# Altium PCB FoodFocus_PCBDoc.PcbDoc
Units mm, origin at the board's own origin, x right, y up, seen from the top; angles counter-clockwise.
Board outline 100 x 60 mm, 2 copper layers (Top Layer, Bottom Layer); 25 components, 24 nets, 93 pads, 0 vias.
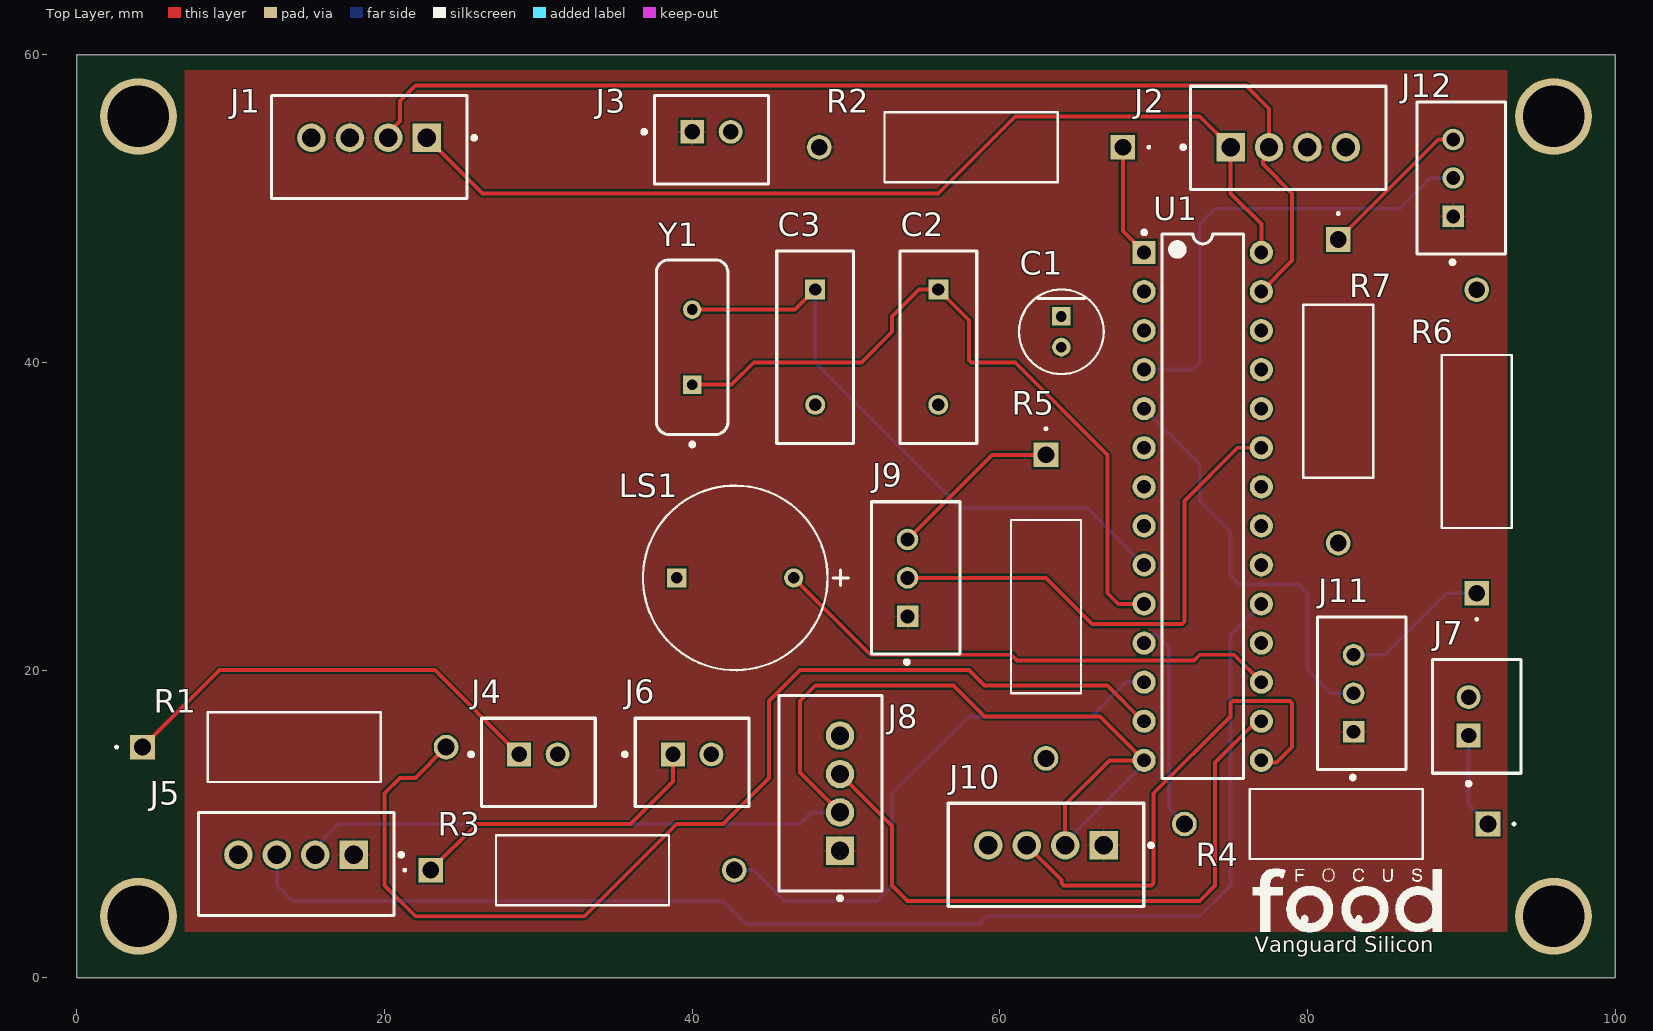
[diagram p0: Top Layer view]
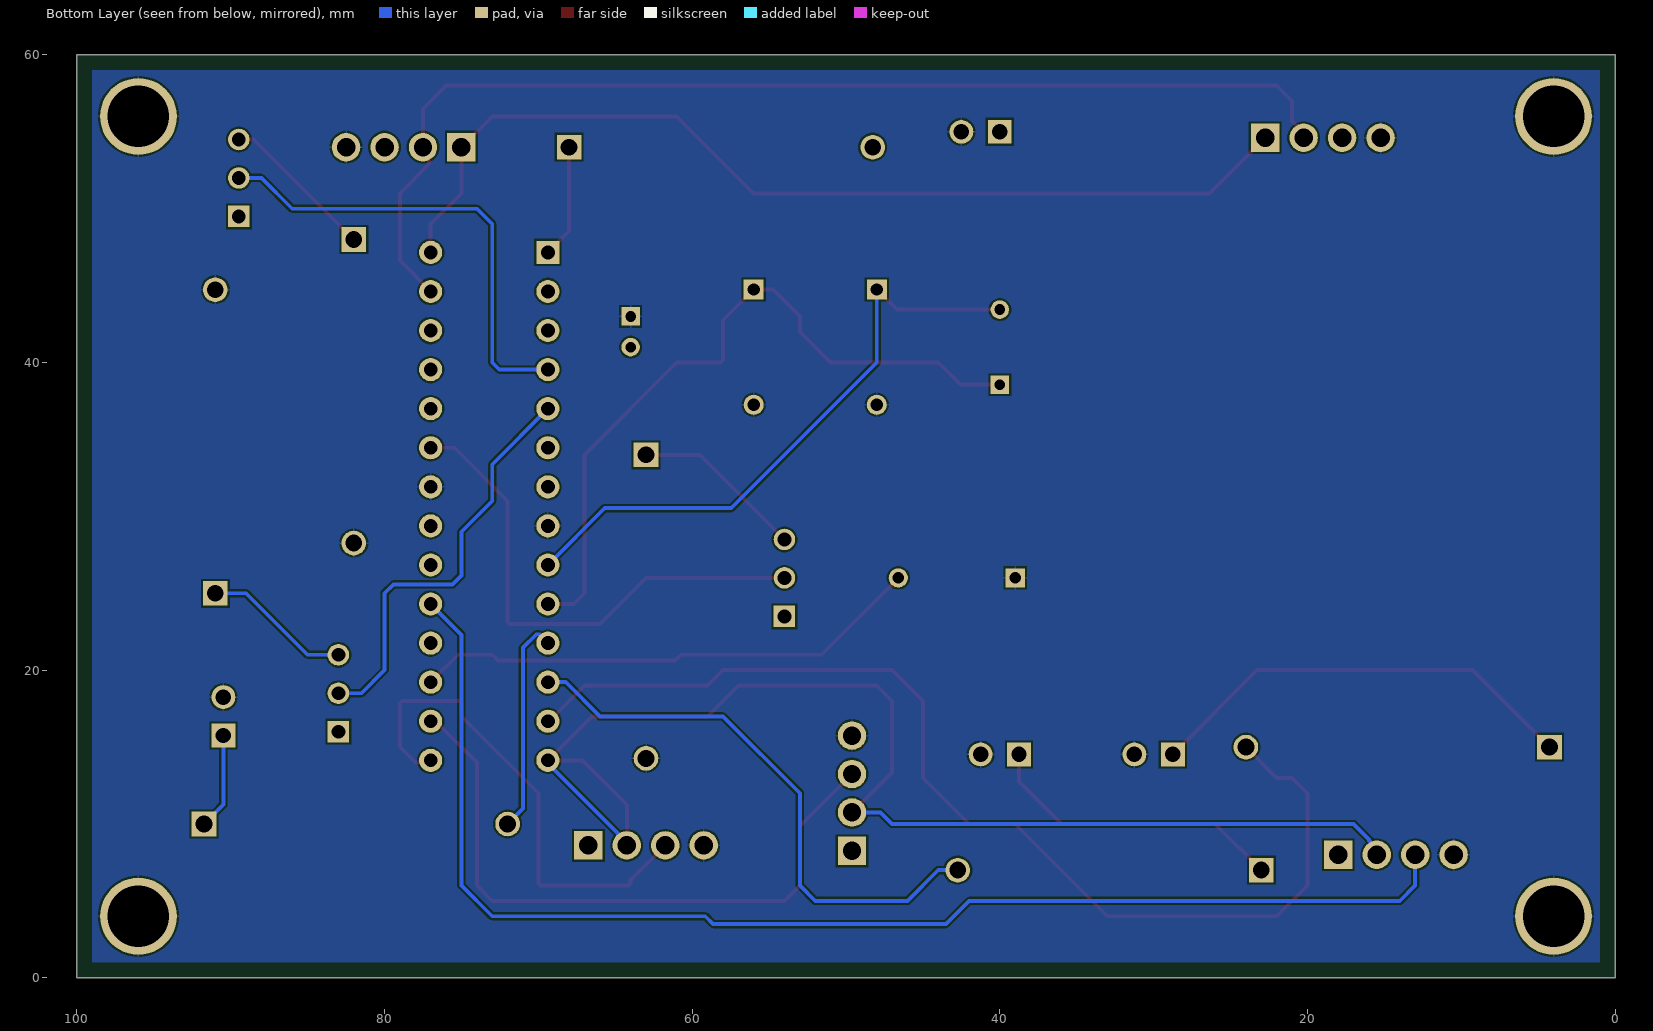
[diagram p1: Bottom Layer view, seen from below]
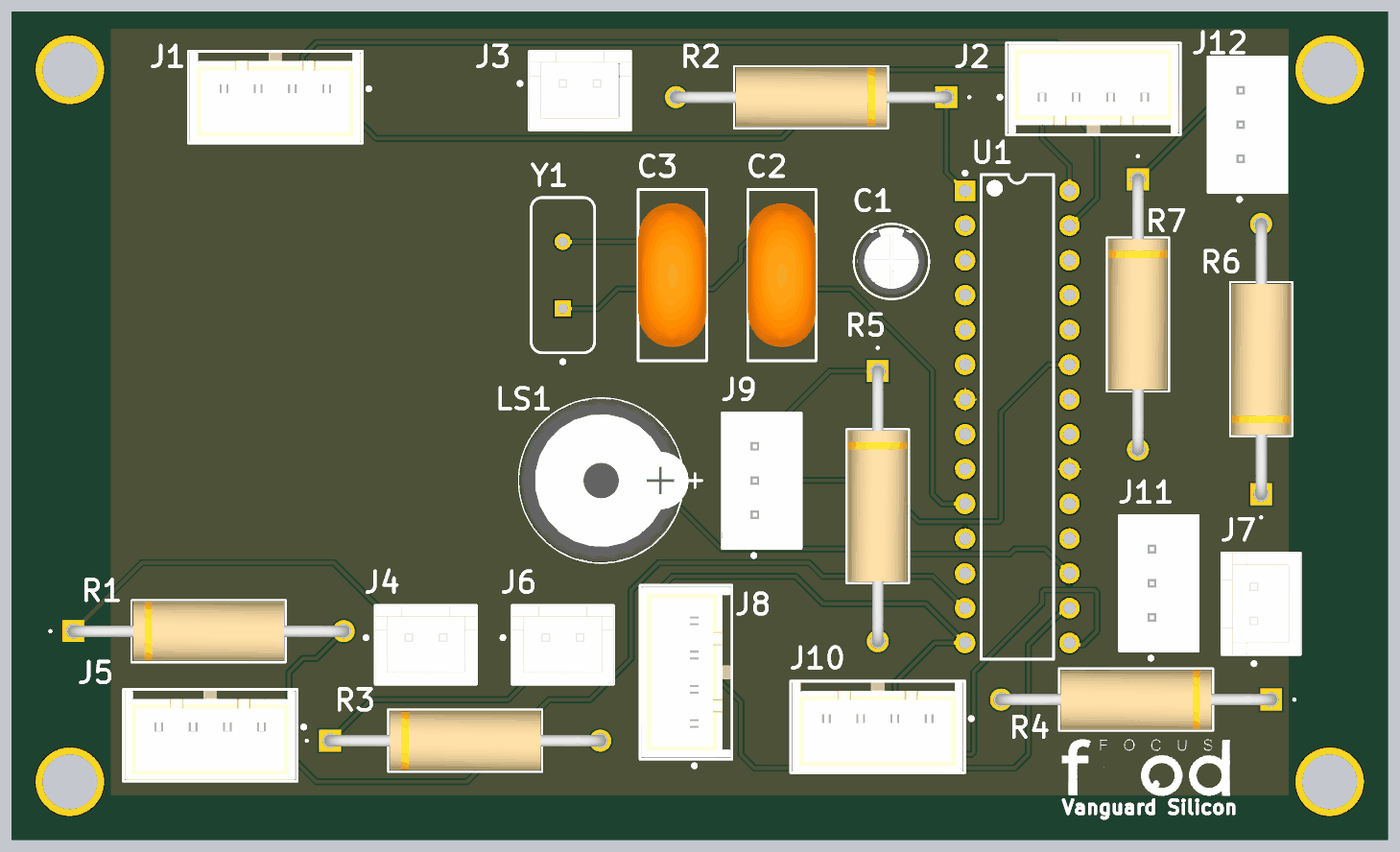
[diagram p2: 3D render of the assembled board from above, using the file's embedded part models]

## Layer stack, top to bottom
Top Solder: solder mask 0.0102, Solder Resist, Dk 3.5
Top Layer: signal copper 0.0356
Dielectric 1: dielectric 0.32, FR-4, Dk 4.8
Bottom Layer: signal copper 0.0356
Bottom Solder: solder mask 0.0102, Solder Resist, Dk 3.5

## Board outline
0,60 100,60 100,0 0,0

## Design rules (kind name [scope] priority, off if disabled: settings)
BoardOutlineClearance [All] p1: gap=0.2 ignorepadtopadclearanceinfootprint=FALSE
Clearance [All] p1: gap=0.127 ignorepadtopadclearanceinfootprint=FALSE except(0.25: Arc-Hole Track-Hole SMDPad-Hole THPad-Hole Via-Hole Fill-Hole Poly-Hole Region-Hole Text-Hole)
ComponentClearance [All] p1: gap=0.127 collisioncheckmode=3 verticalgap=0.127 showdistances=TRUE
DiffPairsRouting [All] p1: maxlimit=0.254 minlimit=0.127 mostfreqgap=0.127 toplayer_minwidth=0.127 toplayer_maxwidth=25.4 toplayer_prefwidth=0.127 bottomlayer_minwidth=0.127 bottomlayer_maxwidth=25.4 bottomlayer_prefwidth=0.127 maxuncoupledlength=12.7
Height [All] p1: minheight=0 maxheight=1816.048 prefheight=12.7
HoleSize [All] p1: absolutevalues=TRUE maxlimit=6.3 minlimit=0.3 maxpercent=80.000 minpercent=20.000
HoleToHoleClearance [All] p1: gap=0.25 allowstackedmicrovias=FALSE
MinimumAnnularRing [All] p1: minimumring=0.076
MinimumSolderMaskSliver [All] p1: minsoldermaskwidth=0
PlaneClearance [All] p1: clearance=0.127
PlaneConnect PlaneConnectPowerPads [InPadClass('PowerPads')] p1: planeconnectstyle=Direct reliefexpansion=0.508 reliefentries=4 reliefconductorwidth=0.254 reliefairgap=0.254
PlaneConnect [All] p2: pad.planeconnectstyle=Relief pad.reliefexpansion=0.3 pad.reliefentries=4 pad.reliefconductorwidth=0.127 pad.reliefairgap=0.127 via.planeconnectstyle=Direct via.reliefexpansion=0.3 via.reliefentries=4 via.reliefconductorwidth=0.127 via.reliefairgap=0.127
PolygonConnect PolygonConnectPowerPads [All vs (InPadClass('PowerPads'))] p1: connectstyle=Direct reliefconductorwidth=0.254 reliefentries=4 polygonreliefangle="90 Angle" airgapwidth=0.254
PolygonConnect [All] p2: thpad.connectstyle=Relief thpad.reliefconductorwidth=0.127 thpad.reliefentries=4 thpad.polygonreliefangle="90 Angle" thpad.airgapwidth=0.127 smdpad.connectstyle=Relief smdpad.reliefconductorwidth=0.127 smdpad.reliefentries=4 smdpad.polygonreliefangle="90 Angle" smdpad.airgapwidth=0.127 via.connectstyle=Direct via.reliefconductorwidth=0.127 via.reliefentries=4 via.polygonreliefangle="90 Angle" via.airgapwidth=0.127
RoutingVias [All] p1: holewidth=0.3 width=0.6 viastyle="Through Hole" minholewidth=0.3 minwidth=0.6 maxholewidth=0.6 maxwidth=6.6
SilkToSilkClearance [All] p1: silktosilkclearance=0
SilkToSolderMaskClearance [IsPad] p1: minsilkscreentomaskgap=0.127 clearancetoexposedcopper=TRUE
SolderMaskExpansion [All] p1: expansion=0.075 istentingtop=FALSE
Width [All] p1: maxlimit=25.4 minlimit=0.127 preferedwidth=0.127 minimp=50.000000 maximp=50.000000 favimp=50.000000
20 further rules are at their usual default settings.

## Components (designator, comment, footprint, x,y, rotation, side; value= is the part's Value field where it differs from the comment)
C1 "10uF" FP-RAD-TH-D_5_0_5-L_11_1-MFG 64,42 r270 top
C2 "22pF" FP-VY2472M49Y5UG63V7-MFG 56,41 r270 top
C3 "22pF" FP-VY2472M49Y5UG63V7-MFG 48,41 r270 top
J1 "J_RTC" FP-35312-0460-MFG 19,54 r180 top
J2 "J_I2C" FP-35312-0460-MFG 78.75,54.61 r0 top
J3 "J_POWER" FP-B2B-XH-A_LF_SN-MFG 41.25,54.475 r0 top
J4 "J_SALT_LED" FP-B2B-XH-A_LF_SN-MFG 30,14 r0 top
J5 "J_SALT_LC" FP-35312-0460-MFG 14.25,7.39 r180 top
J6 "J_SUGAR_LED" FP-B2B-XH-A_LF_SN-MFG 40,14 r0 top
J7 "J_OIL_LED" FP-B2B-XH-A_LF_SN-MFG 91,17 r90 top
J8 "J_SUGAR_LC" FP-35312-0460-MFG 49,12 r90 top
J9 "J_POT" FP-B3B-XH-A_LF_SN-MFG 54.525,26 r90 top
J10 "J_OIL_LC" FP-35312-0460-MFG 63,8 r180 top
J11 "J_CFM_PUSH" FP-B3B-XH-A_LF_SN-MFG 83.525,18.5 r90 top
J12 "J_RPT_PUSH" FP-B3B-XH-A_LF_SN-MFG 90,52 r90 top
LS1 "BUZZER" FP-MCKPX-G1203A-K4056-MFG 42.8,26 r0 top
R1 "R_SALT_LED" RES_AC01_VIS 4.264,15 r0 top
R2 "R_ATMEGA" RES_AC01_VIS 68,54 r180 top
R3 "R_SUGAR_LED" RES_AC01_VIS 23,7 r0 top
R4 "R_OIL_LED" RES_AC01_VIS 91.736,10 r180 top
R5 "R_POT" RES_AC01_VIS 63,34 r270 top
R6 "R_CFM_PUSH" RES_AC01_VIS 91,25 r90 top
R7 "R_RPT_PUSH" RES_AC01_VIS 82,48 r270 top
U1 "ATmega328-PU" 28P3 73.19,30.65 r0 top
Y1 "16MHz" FOX-FOXSLF160-20 40,41 r90 top

## Footprints (in the part's own frame and the unit in brackets; to place one, negate y for a bottom-side part, rotate by r counter-clockwise, add the part's x,y. Pads: shape width x height; smd on the part's side, far side on the other; paste and mask are expansions set on the pad)
28P3 [mm] "28-Pin Plastic Dual In-Line Package (PDIP)"
  rect 1.5x1.5 hole 0.9: 1(-3.81,16.51)
  round 1.5 hole 0.9: 2(-3.81,13.97) 3(-3.81,11.43) 4(-3.81,8.89) 5(-3.81,6.35) 6(-3.81,3.81) 7(-3.81,1.27) 8(-3.81,-1.27) 9(-3.81,-3.81) 10(-3.81,-6.35) 11(-3.81,-8.89) 12(-3.81,-11.43) 13(-3.81,-13.97) 14(-3.81,-16.51) 15(3.81,-16.51) 16(3.81,-13.97) 17(3.81,-11.43) 18(3.81,-8.89) 19(3.81,-6.35) 20(3.81,-3.81) 21(3.81,-1.27) 22(3.81,1.27) 23(3.81,3.81) 24(3.81,6.35) 25(3.81,8.89) 26(3.81,11.43) 27(3.81,13.97) 28(3.81,16.51)
  silkscreen extent -3.93,-17.7 2.65,17.93, body extent -3.6,-17.65 3.6,17.65, height 4.58
FOX-FOXSLF160-20 [mm] "THD, 2-Leads, Body 11.35x4.65mm"
  rect 1.2x1.2 hole 0.7: 1(-2.44,0)
  round 1.2 hole 0.7: 2(2.44,0)
  silkscreen extent -6.45,-2.32 5.68,2.32, body extent -5.67,-2.32 5.68,2.33, height 3.6
FP-35312-0460-MFG [mm]
  rect 1.85x1.85 hole 1.2 paste-1000 mask+0: 1(-3.75,-0.61)
  round 1.85 hole 1.2 paste-1000 mask+0: 2(-1.25,-0.61) 3(1.25,-0.61) 4(3.75,-0.61)
  silkscreen extent -6.96,-3.35 6.36,3.35, body extent -6.46,-3.45 6.46,3.45, height 0.25
FP-B2B-XH-A_LF_SN-MFG [mm]
  rect 1.55x1.55 hole 1 paste-1000 mask+0: 1(-1.25,0.525)
  round 1.55 hole 1 paste-1000 mask+0: 2(1.25,0.525)
  silkscreen extent -4.5,-2.88 3.7,2.88, body extent -3.8,-2.98 3.8,2.98, height 0.25
FP-B3B-XH-A_LF_SN-MFG [mm]
  rect 1.4x1.4 hole 0.9 paste-1000 mask+0: 1(-2.5,0.525)
  round 1.4 hole 0.9 paste-1000 mask+0: 2(0,0.525) 3(2.5,0.525)
  silkscreen extent -5.6,-2.88 4.95,2.88, body extent -5.05,-2.98 5.05,2.98, height 0.25
FP-MCKPX-G1203A-K4056-MFG [mm]
  rect 1.25x1.25 hole 0.75 paste-1000 mask+0: 1(-3.8,0)
  round 1.25 hole 0.75 paste-1000 mask+0: 2(3.8,0)
  silkscreen extent -6,-6 7.35,6, body extent -6.1,-6.1 6.1,6.1, height 0.25
FP-RAD-TH-D_5_0_5-L_11_1-MFG [mm]
  rect 1.2x1.2 hole 0.7 paste-1000 mask+0: 1(-1,0)
  round 1.2 hole 0.7 paste-1000 mask+0: 2(1,0)
  silkscreen extent -2.75,-2.75 2.75,2.75, body extent -2.85,-2.85 2.85,2.85, height 0.25
FP-VY2472M49Y5UG63V7-MFG [mm]
  rect 1.3x1.3 hole 0.8 paste-1000 mask+0: 1(-3.75,0)
  round 1.3 hole 0.8 paste-1000 mask+0: 2(3.75,0)
  silkscreen extent -6.25,-2.5 6.25,2.5, body extent -6.35,-2.6 6.35,2.6, height 0.25
RES_AC01_VIS [mil]
  rect 63x63 / inner round 60 / far side rect 63x63 hole 43 paste-31.5 mask+0: 1(0,0)
  round 63 / inner round 60 / far side round 63 hole 43 paste-31.5 mask+0: 2(777,0)
  silkscreen extent -69,-90 610,90, body extent -16,-84 794,84, height 169

## Part data
C1: library part CMP-05427-000869-1, "Aluminum Electrolytic Capacitors (Radial Lead Type) 10uF ±20% 100V", Case/Package=Radial, Dielectric Material=Aluminium, Leakage Current=3uA, Max Operating Temperature=85°C, Min Operating Temperature=-40°C, Package Quantity=200, Ripple Current=70mA, Tolerance=20%, Voltage=100V, Capacitance=10uF, Construction=RADIAL, Contact Plating=Tin, Diameter=5mm, Dissipation Factor=0.1%, Height=11mm, Height - Seated (Max)=0.472inch, Lead Diameter=0.5mm, Lead Free="Lead Free", Lead Pitch=2mm, Lead/Base Style=Straight, Length=11mm, Life (Hours)=2000Hour, Mount="Through Hole", Number of Pins=2, Packaging=Bulk, Polarity=Polar, Radiation Hardening=No, REACH SVHC="No SVHC", Ripple Current (AC)=70mA, RoHS Compliant=Yes, Series=M, Termination=Radial, Voltage Rating=100V, Voltage Rating (DC)=100V, Width=5mm
C2 C3: library part CMP-02417-000047-1, "Capacitor Ceramic 4700pF ±20% Y5U BULK RADIAL", Capacitance=4.7nF, Case/Package=Radial, Dielectric=Y5U, Max Operating Temperature=125°C, Min Operating Temperature=-40°C, Package Quantity=1000, Resistor Type=Ceramic, Tolerance=20%, Voltage Rating=300V, Body Diameter=12.5mm, Diameter=12.5mm, Dissipation Factor=2.5%, Height - Seated (Max)=0.65inch, Lead Diameter=0.6mm, Lead Pitch=7.5mm, Lead/Base Style=Kinked, Mount="Through Hole", Packaging=Bulk, REACH SVHC="No SVHC", RoHS Compliant=Yes, Series=VY2, Termination=Radial, Thickness=5mm, Voltage Rating (AC)=300V, Voltage Rating (DC)=300V, Weight=0.040932oz
J1 J2 J5 J8 J10: library part CMP-04776-000928-1, "CONN HEADER 4POS 2.5MM VERT", Contact Resistance=20mR, Current Rating=3A, Max Operating Temperature=105°C, Min Operating Temperature=-40°C, Package Quantity=1000, Voltage Rating=250V, Contact Gender=Male, Contact Material=Brass, Contact Plating=Tin, Contact Post Length=3.4mm, Gender=Male, Glow Wire Compliant=Non-compliant, Housing Material=Nylon, Mount="Through Hole", Number of Circuits=4, Number Of Contacts=4, Number of Positions=4, Number Of Rows=1, Orientation=Vertical, Packaging=Bulk, Pitch=2.5mm, RoHS Compliant=Yes, Series=35312, Termination=Solder
J3 J4 J6 J7: library part CMP-2000-05888-3, "CONN HEADER VERT 2POS 2.5MM", Color=Natural, Contact Resistance=20mR, Current Rating=3A, Housing Color=White, Insulation Resistance=1GR, Max Operating Temperature=85°C, Max Voltage Rating (AC)=250V, Min Operating Temperature=-25°C, Connector Type="Male Pin", Contact Material=Brass, Contact Plating=Tin, Contact Type="Male Pin", Depth=5.75mm, Fastening Type=Detent, Housing Material=Polyamide, Lead Free="Lead Free", Lead Pitch=2.5mm, Length=7.4mm, Max Current Rating=3A, Max Voltage Rating (DC)=250V, Mount="Through Hole", Number Of Contacts=2, Number of Positions=2, Number Of Rows=1, Orientation=Straight, Packaging=Bulk, Pitch=2.5mm, REACH SVHC="No SVHC", Series=XH, Termination=Solder, Voltage Rating=250V, Voltage Rating (AC)=250V, Wire/Cable Gauge=22AWG
J9 J11 J12: library part CMP-17439-000014-3, "CONN HEADER VERT 3POS 2.5MM", Color=Natural, Contact Resistance=20mR, Current Rating=3A, Flammability Rating="UL94 V-0", Housing Color=White, Insulation Resistance=1GR, Max Operating Temperature=85°C, Max Voltage Rating (AC)=250V, Min Operating Temperature=-25°C, Connector Type=Header, Contact Finish - Mating=TIN, Contact Material=Brass, Contact Plating=Tin, Contact Shape=Square, Contact Type="Male Pin", Depth=5.75mm, Fastening Type=Detent, Gender=Male, Housing Material=Polyamide, Insulation Color=Natural, Insulation Material=Nylon, Lead Free="Lead Free", Lead Pitch=2.5mm, Length=9.9mm, Max Current Rating=3A, Max Voltage Rating (DC)=250V, Mount="Through Hole", Number Of Contacts=3, Number of Positions=3, Number Of Rows=1, Orientation=Straight, Packaging=Bulk, Pitch=2.5mm, REACH SVHC="No SVHC", Series=XH, Termination=Solder, Voltage Rating=250V, Voltage Rating (AC)=250V, Wire/Cable Gauge=22AWG
LS1: library part CMP-12433-000001-1, "MAGNETIC BUZZER AND TRANSDUCER - More Details", Current=30mA, Frequency=2300Hz, Manufacturer="Multicomp Pro", Manufacturer Part Number=MCKPX-G1203A-K4056, Max Supply Voltage=5V, Min Supply Voltage=2V, Operating Supply Voltage=3V, Package=0, Temperature="-20°C to +70°C", Temperature Range High=+70°C, Temperature Range Low=-20°C, Automotive=No, Category=Speak, ComponentLink2Description=Datasheet, ComponentLink2URL=http://www.farnell.com/datasheets/1498149.pdf?_ga=2.17855225.1157923166.1572356775-536200964.1569240579, Device Class L1=Electromechanical, Device Class L2="Audio Products", Device Class L3=Buzzers, Height=9.5mm, Lead Free=Yes, Octopart=https://octopart.com/mckpx-g1203a-k4056-multicomp-12157154, RoHS=TRUE, Standoff Height=0.5mm
R1 R2 R3 R4 R5 R6 R7: library part CMP-00030-42338632-1, "AC01000002200JA100 Resistor, 220 Ohm, ± 5%, 1 W, Axial Leaded, Wirewound, General Purpose", Case/Package=Conformal, Max Operating Temperature=275°C, Max Power Dissipation=1W, Min Operating Temperature=-40°C, Resistance=220Ω, Temperature Coefficient=180ppm/°C, Tolerance=5%, Voltage Rating=15V, Composition=Wirewound, Contact Plating=Tin, Diameter=4.3mm, Features="Flame Retardant Coating", Lead Diameter=800µm, Lead Free="Lead Free", Length=11mm, Military Standard=Not, NexarPartId=42338632, Number of Pins=2, Number of Terminations=2, Packaging="Cut Tape (CT)", Power Rating=1W, REACH SVHC=Unknown, RoHS=Compliant, Schedule B="8533210080, 8533210080", Termination=Axial, Voltage Rating (DC)=15V
U1: library part CMP-0095-00015-2, "8-bit AVR Microcontroller, 32KB Flash, 1KB EEPROM, 2KB SRAM, 28-pin PDIP, Industrial Grade (-40°C to 85°C)", ComponentLink1Description="Manufacturer URL", ComponentLink1URL=http://www.atmel.com/, ComponentLink2Description="ATmega48A/48PA/88A/88PA/168A/168PA/328/328P Datasheet", ComponentLink2URL=http://www.atmel.com/dyn/resources/prod_documents/8271.pdf, ComponentLink3Description="ATmega48A/48PA/88A/88PA/168A/168PA/328/328P Summary", ComponentLink3URL=http://www.atmel.com/dyn/resources/prod_documents/8271S.pdf, DatasheetVersion="revD, May-2011", PackageDescription="28-lead (0.300\"/7.62mm Wide) Plastic Dual Inline Package (PDIP)", PackageReference=28P3, PackageVersion="revB, Sep-2001", RevisionNote="DatasheetVersion updated. URLs added."
Y1: library part CMP-1749-00003-1, "Resistance Weld Thru-Hole Crystal, 16 MHz, -20 to 70 degC, 2-Pin THD, RoHS, Bulk", Case\Package=Axial, Max Operating Temperature="155 degC", Min Operating Temperature="-55 degC", Package Quantity=200, Power Rating="250 mW", Resistance="221 kohm", Tolerance=1%, Voltage Rating="250 V", ComponentLink1Description="Manufacturer URL", ComponentLink1URL=http://www.foxonline.com/, ComponentLink2Description=Datasheet, ComponentLink2URL=http://www.foxonline.com/pdfs/hc49slf.pdf, DatasheetVersion=Mar-15, Length="0.248 inch", Mount="Through Hole", PackageDescription="2-Pin Through Hole Device, Body 11.35 x 4.65 mm", PackageReference=FOXSLF160-20, Packaging=Bulk, RoHSCompliant=true

## Free pads (board coordinates)
  round 5 hole 4: 2(4,56) 3(4,4) 4(96,4) 5(96,56)

## Nets (pads, with @x,y where several pads share a name; then routed paths per layer and width w, separated by ;. In a path a pad name is that pad's centre, name@x,y a point inside that pad or via, vN(x,y) a via of type N, cw(c..) or ccw(c..) an arc to the next point about the centre after c; other vN are vias at no path point)
+5V: C1.2 J1.3 J2.3 J3.1 J5.1 J8.1 J9.1 J10.1 J11.1 J12.1 R2.2 U1.7 U1.20
BUZZER: LS1.2 U1.17 | length 33.5
  Top Layer w0.254: LS1.2 51.6,21 60.739,21 61.11,20.629 72.629,20.629 73,21 75.22,21 U1.17
CONFIRM_PUSH: J11.2 U1.5 | length 27.3
  Bottom Layer w0.254: U1.5 73,33.38 73,31 75,29 75,26.149 75.574,25.574 79.426,25.574 80,25 80,20 81.5,18.5 J11.2
DT_OIL_LC: J10.3 U1.15 | length 33
  Top Layer w0.254: J10.3 64,6.36 64,6.149 64.149,6 69.851,6 70,6.149 70,12 75,17 75,17.851 75.149,18 78.851,18 79,17.851 79,15 78,14 76.86,14 U1.15
DT_SALT_LC: J5.3 U1.19 | length 85.2
  Bottom Layer w0.254: J5.3 13,6 14,5 42,5 43.508,3.492 58.641,3.492 59.149,4 73,4 75,6 75,22.3 U1.19
DT_SUGAR_LC: J8.3 U1.16 | length 42.6
  Top Layer w0.254: J8.3 53,9.86 53,6 54,5 73,5 74,6 74,14 76.68,16.68 U1.16
GND: C1.1 C2.2 C3.2 J1.4 J2.4 J3.2 J4.2 J5.4 J6.2 J7.2 J8.4 J10.4 LS1.1 pad.2 pad.3 pad.4 pad.5 R5.2 R6.2 R7.2 U1.8 U1.22
NetC2_1: C2.1 U1.10 Y1.1 | length 47.8
  Top Layer w0.254: Y1.1 42.56,38.56 44,40 51,40 53,42 53,43 54.75,44.75 C2.1 58,42.75 58,40.149 58.149,40 61,40 67,34 67,25 67.7,24.3 U1.10
NetC3_1: C3.1 U1.9 Y1.2 | length 40.1
  Top Layer w0.254: Y1.2 46.69,43.44 C3.1
  Bottom Layer w0.254: C3.1 48,40 57.461,30.539 65.681,30.539 U1.9
NetJ4_1: J4.1 R1.1 | length 28.8
  Top Layer w0.254: R1.1 9.264,20 23.275,20 J4.1
NetJ6_1: J6.1 R3.1 | length 19.9
  Top Layer w0.254: R3.1 26,10 36,10 38.75,12.75 J6.1
NetJ7_1: J7.1 R4.1 | length 7.2
  Top Layer w0.254: J7.1@89.827,15.102 J7.1
  Bottom Layer w0.254: J7.1 90.475,11.261 R4.1
NetJ9_3: J9.3 R5.1 | length 11.3
  Top Layer w0.254: J9.3 59.5,34 R5.1
NetJ11_3: J11.3 R6.1 | length 9.7
  Bottom Layer w0.254: J11.3 85,21 89,25 R6.1
NetJ12_3: J12.3 R7.1 | length 10.2
  Top Layer w0.254: R7.1 88.5,54.5 J12.3
NetR2_1: R2.1 U1.1 | length 7.4
  Top Layer w0.254: R2.1 68,48.54 U1.1
OIL_LED: R4.2 U1.11 | length 14.6
  Bottom Layer w0.254: U1.11 69.567,21.76 69.768,21.559 69.768,22.188 69.916,22.336 70.127,22.336 71,21.463 71,11 R4.2
POT: J9.2 U1.23 | length 33.6
  Top Layer w0.254: J9.2 63,26 66,23 71.851,23 72,23.149 72,31 75.46,34.46 U1.23
REPORT_PUSH: J12.2 U1.4 | length 30.5
  Bottom Layer w0.254: U1.4 72.54,39.54 73,40 73,49 74,50 86,50 88,52 J12.2
SALT_LED: R1.2 U1.13 | length 72.4
  Top Layer w0.254: R1.2 22,13 21,13 20,12 20,6 22,4 33,4 39,10 42,10 45,13 45,18 47,20 58,20 59,19 67,19 69.32,16.68 U1.13
SCK_LC: J5.2 J8.2 J10.2 U1.14 | length 85.3
  Top Layer w0.254: J8.2 47,13.36 47,18 48,19 57,19 59,17 66.52,17 U1.14 67.14,14.14 64.25,11.25 J10.2
  Bottom Layer w0.254: J5.2 15.5,8.432 16,8.932 16,9 17,10 47,10 47.75,10.75 J8.2 ; J10.2 64.25,8.81 69.38,13.94 U1.14
SCL: J1.1 J2.1 U1.28 | length 64.3
  Top Layer w0.254: J1.1 26.36,51 56,51 61,56 73,56 J2.1 75,51 77,49 U1.28
SDA: J1.2 J2.2 U1.27 | length 73.9
  Top Layer w0.254: J1.2 20.25,54.957 21,55.707 21,57 22,58 76,58 77.5,56.5 J2.2 77.195,53.695 77.195,53.195 77.105,53.105 77.105,52.895 79,51 79,46.62 U1.27
SUGAR_LED: R3.2 U1.12 | length 37.1
  Top Layer w0.254: R3.2 R3.2@42.917,7.181
  Bottom Layer w0.254: R3.2 44,7 46,5 52,5 53,6 53,12 58,17 66,17 68.22,19.22 U1.12
pads on no net: U1.2 U1.3 U1.6 U1.18 U1.21 U1.24 U1.25 U1.26

## Polygon pours and split planes (outlines as drawn)
GND on Bottom Layer "GND" (solid, pour order 2): 1,1 1,59 99,59 99,1
+5V on Top Layer "GND" (solid, pour order 3): 93,59 93,3 7,3 7,59

## Silkscreen, mask and mechanical layers (free items; w line width, h text height)
Top Overlay:
  drawing of 9 lines, arcs and shapes, not listed
  text "Vanguard Silicon" at 76.573,1.667 h1
Board:
  the board outline again, w0.5
Top Assembly:
  region: 4,50 34,50 34,21 4,21